# Altium PCB PR2017-DC_Load_Mosfet.PcbDoc
Units mm, origin at the board's own origin, x right, y up, seen from the top; angles counter-clockwise.
Board outline 275.1 x 160 mm, 2 copper layers (Top Layer, Bottom Layer); 69 components, 95 nets, 275 pads, 0 vias.
Unrouted connection lines stored in the file: 176.
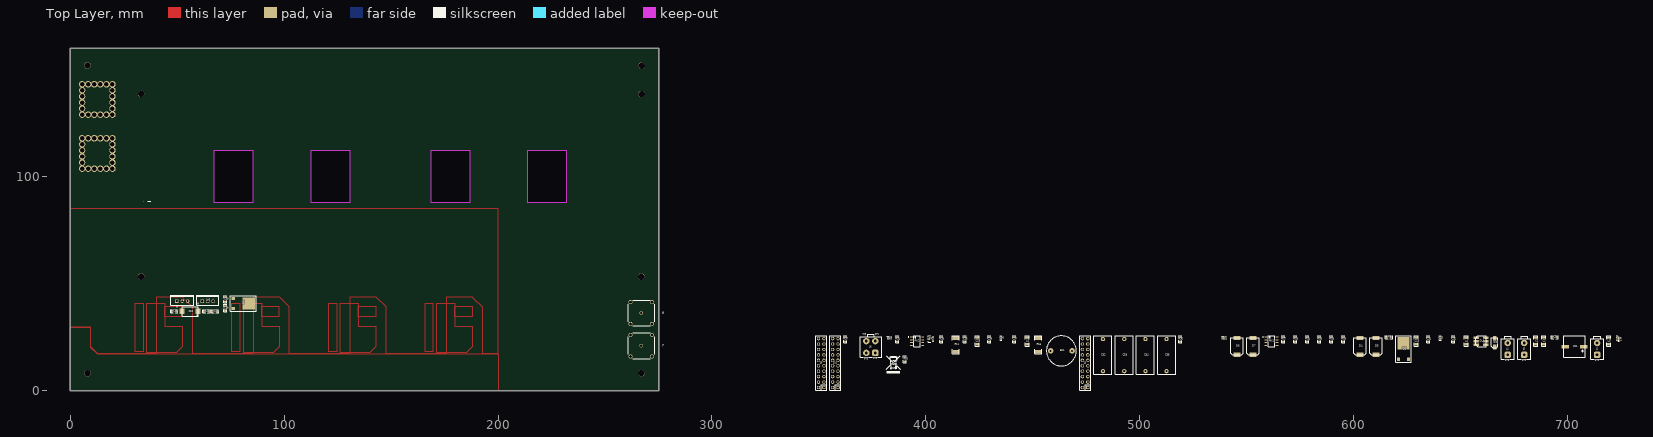
[diagram p0: Top Layer view]
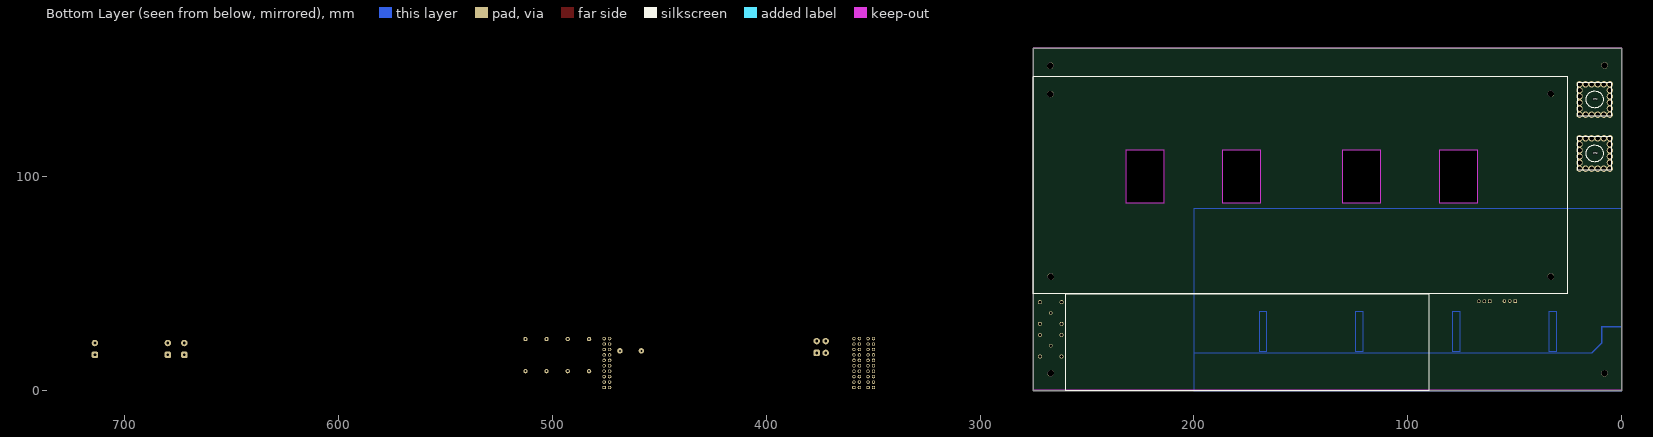
[diagram p1: Bottom Layer view, seen from below]

## Layer stack, top to bottom
Top Solder: solder mask 0.0102, Solder Resist, Dk 3.5
Top Layer: signal copper 0.0356
Dielectric 1: dielectric 0.32, FR-4, Dk 4.8
Bottom Layer: signal copper 0.0356
Bottom Solder: solder mask 0.0102, Solder Resist, Dk 3.5

## Board outline
0,0 0,160 275.1,160 275.1,0
cut-out: 67.35,87.85 67.35,112.35 85.35,112.35 85.35,87.85
cut-out: 168.75,87.85 168.75,112.35 186.75,112.35 186.75,87.85
cut-out: 112.55,87.85 112.55,112.35 130.55,112.35 130.55,87.85
cut-out: 213.85,87.85 213.85,112.35 231.85,112.35 231.85,87.85

## Design rules (kind name [scope] priority, off if disabled: settings)
Clearance Keep-Poly [(OnLayer('Keep-Out Layer')) vs (InPoly)] p1: gap=0.5 ignorepadtopadclearanceinfootprint=FALSE
Clearance Polygon [All vs (InPoly)] p2: gap=1 ignorepadtopadclearanceinfootprint=FALSE
Clearance Keepout [All vs (OnLayer('Keep-Out Layer'))] p3: gap=0.5 ignorepadtopadclearanceinfootprint=FALSE
Clearance [All] p4: gap=0.2 ignorepadtopadclearanceinfootprint=FALSE
ComponentClearance [All] p1: gap=0.1 collisioncheckmode=3 verticalgap=0.2 showdistances=FALSE
DiffPairsRouting [All] p1: maxlimit=0.254 minlimit=0.254 mostfreqgap=0.254 toplayer_minwidth=0.381 toplayer_maxwidth=0.381 toplayer_prefwidth=0.381 bottomlayer_minwidth=0.381 bottomlayer_maxwidth=0.381 bottomlayer_prefwidth=0.381 maxuncoupledlength=12.7
FabricationTestPointUsage TestPointUsage [All] p1: valid=0 allowmultiple=FALSE
FabricationTestpoint Testpoint [All] p1: side=3 testpointundercomponent=TRUE minsize=1.016 maxsize=2.54 preferedsize=1.524 minholesize=0 maxholesize=1.016 preferedholesize=0.813 testpointgrid=0.025 allowsidetop=TRUE allowsidebottom=TRUE usegrid=TRUE gridtolerance=0
HoleSize [All] p1: absolutevalues=TRUE maxlimit=3.5 minlimit=0 maxpercent=80.000 minpercent=20.000
PlaneClearance [All] p1: clearance=1
PlaneConnect [All] p1: planeconnectstyle=Direct reliefexpansion=0.508 reliefentries=4 reliefconductorwidth=0.254 reliefairgap=0.254
PolygonConnect PolygonConnect_1 [InNet('BAT+')] p1: connectstyle=Direct reliefconductorwidth=0.254 reliefentries=4 polygonreliefangle="90 Angle" airgapwidth=0.254
PolygonConnect [All] p2: connectstyle=Direct reliefconductorwidth=0.8 reliefentries=4 polygonreliefangle="90 Angle" airgapwidth=0.254
RoutingVias [All] p1: holewidth=0.3 width=0.6 viastyle="Through Hole" minholewidth=0.3 minwidth=0.6 maxholewidth=0.8 maxwidth=1.3
SolderMaskExpansion [(IsVia)] p1: expansion=-10 istentingtop=FALSE
Width SGND [InNet('SGND')] p1: maxlimit=2 minlimit=0.3 preferedwidth=0.5 minimp=50.000000 maximp=50.000000 favimp=50.000000
Width PGND [InNet('PGND')] p2: maxlimit=3 minlimit=0.5 preferedwidth=0.5 minimp=50.000000 maximp=50.000000 favimp=50.000000
Width [All] p3: maxlimit=2 minlimit=0.2 preferedwidth=0.2 minimp=50.000000 maximp=50.000000 favimp=50.000000
23 further rules are at their usual default settings.

## Classes and differential pairs
component class PR2017-DC_LoadMotherBoard: Bz1 C1 C2 C3 C15 C21 C22 C23 C24 C25 C27 C28 C29 C30 C32 C33 C34 C35 CES1 CT2 CT3 D2 D4 D5 D6 D7 DL1 J1 J3 J4 J5 J6 J7 J8 J9 J10 L3 L4 L5 Q2 R3 R10 R11 R13 R14 R15 R16 R17 R18 R19 R20 R23 R24 R27 RN1 RN2 TR2 U1 U7 U8
channel class Pwr: U_Pwr1 U_Pwr2 U_Pwr3 U_Pwr4
net class Temperature[1..4]: Temperature1 Temperature2 Temperature3 Temperature4
net class Out_Current[1..4]: Out_Current1 Out_Current2 Out_Current3 Out_Current4
component class PowerSupply: C10 C11 C12 C17 C18 C19 U4 U5 U6
differential pair Power: +Power_P -Power_N

## Components (designator, comment, footprint, x,y, rotation, side; value= is the part's Value field where it differs from the comment)
Bz1 "BUZZER" CB13PA 463.399,18.552 r0 top
C1 "10uF X7R 50V" 1206 685.199,23.152 r90 top
C2 "10uF X7R 50V" 1206 688.999,23.152 r90 top
C3 "100nF X7R 100V" 0805 694.099,24.952 r0 top
C10 "22uF 25V" TANT_D 56,37 r0 top
C11 "1uF X7R 25V" 0805 48.6,37 r0 top
C12 "100nF X7R 50V" 0805 63.7,37 r0 top
C15 "100nF X7R 100V" 0805 418.199,23.952 r90 top
C17 "10uF X5R 10V" 0805 67.6,37 r180 top
C18 "100nF X7R 50V" 0805 72.5,38.6 r90 top
C19 "10uF X5R 10V" 0805 72.5,42.7 r270 top
C21 "220uF 50V" C_G55 703.299,20.552 r0 top
C22 "10pF C0G" 0805 646.599,23.952 r90 top
C23 "10uF X7R 50V" 1206 629.299,23.152 r90 top
C24 "100nF X7R 100V" 0805 634.899,23.952 r90 top
C25 "1nF X7R 50V" 0603 640.499,24.552 r90 top
C27 "10pF C0G" 0805 441.299,23.952 r90 top
C28 "10uF X7R 50V" 1206 423.999,23.152 r90 top
C29 "100nF X7R 100V" 0805 429.599,23.952 r90 top
C30 "1nF X7R 50V" 0603 435.199,24.552 r90 top
C32 "1uF 250V" POL-P15 482.799,16.552 r90 top
C33 "1uF 250V" POL-P15 492.799,16.552 r90 top
C34 "1uF 250V" POL-P15 502.699,16.552 r90 top
C35 "1uF 250V" POL-P15 512.599,16.552 r90 top
CES1 "CESTINO" Cestino1 384.799,13.1 r0 top
CT2 "POWERPLUS F-M8" "PowerPlus M8" 12.6,136.1 r270 bottom
CT3 "POWERPLUS F-M8" "PowerPlus M8" 12.6,110.851 r270 bottom
D2 "STPS140A" SMA 665.999,22.352 r90 top
D4 "STPS5L60SY" SMC 602.999,20.652 r90 top
D5 "STPS5L60SY" SMC 610.499,20.652 r90 top
D6 "STPS5L60SY" SMC 545.499,20.652 r90 top
D7 "STPS5L60SY" SMC 552.999,20.652 r90 top
DL1 "LED_5050RGB" LED_5050RGB 659.599,23.052 r0 top
J1 "M_FIT1X2" M_FIT_JR1X2V 713.899,19.452 r0 top
J3 "ToDAS" IDC-20 474.499,12.852 r90 top
J4 "M_FIT1X2" M_FIT_JR1X2V 672.099,19.452 r0 top
J5 "M_FIT1X2" M_FIT_JR1X2V 679.799,19.452 r0 top
J6 "M_FIT2X2_BUS" M_FIT_JR2X2V 374.3,20.35 r0 top
J7 "51K204-400A5" ROS-51K204-400A5_V 266.95,20.95 r270 top
J8 "51K204-400A5" ROS-51K204-400A5_V 266.95,36.25 r270 top
J9 "FromDAS" IDC-20 351.099,12.852 r90 top
J10 "ToFrontPanel" IDC-20 357.699,12.852 r90 top
L3 "80R 3A" 1206 719.399,23.152 r90 top
L4 "80R 3A" 1206 652.699,23.152 r90 top
L5 "80R 3A" 1206 447.399,23.152 r90 top
Q2 "STD30NF06LT4" DPAK 623.399,18.352 r90 top
R3 "470R" 0805 616.599,24.952 r0 top
R10 "100K" 0805 390.199,14.6 r90 top
R11 "2K" 2512 414.099,21.352 r90 top
R13 "1K8" 0805 572.699,23.952 r90 top
R14 "1K8" 0805 578.299,23.952 r90 top
R15 "120K" 2512 452.499,21.352 r90 top
R16 "1K8" 0805 583.899,23.952 r90 top
R17 "100K" 0805 567.099,23.952 r90 top
R18 "470R" 0805 589.499,23.952 r90 top
R19 "470R" 0805 595.099,23.952 r90 top
R20 "50R" 0805 518.999,23.952 r90 top
R23 "2K7" 0805 407.299,23.952 r90 top
R24 "100K" 0805 386.599,23.952 r90 top
R27 "50R" 0805 362.399,23.952 r90 top
RN1 "AORN100-1AT5" FP-AORN100-1AT5-IPC_C 561.599,23.052 r0 top value=1/100kΩ
RN2 "AORN100-1AT5" FP-AORN100-1AT5-IPC_C 395.899,23.052 r0 top value=1/100kΩ
TR2 "MMBT2222ALT1G" SOT-23 402.399,24.052 r0 top
U1 "AD5641AKSZ-500RL7" KS-6_L 724.099,24.052 r0 top
U4 "LD1117DT33" TO-252-7805 79.8,40.695 r0 top
U5 "LM2940CT-9.0/NOPB" NDE0003A 52.3,41.8 r0 top
U6 "LD1117V50" TO220 64.2,41.7 r0 top
U7 "NCS20071" SOT-553-5 539.599,24.552 r0 top
U8 "NCS20071" SOT-553-5 382.999,24.552 r0 top

## Footprints (in the part's own frame and the unit in brackets; to place one, negate y for a bottom-side part, rotate by r counter-clockwise, add the part's x,y. Pads: shape width x height; smd on the part's side, far side on the other; paste and mask are expansions set on the pad)
0603 [mil]
  rect 30x30 smd: 1(-27.5,0) 2(27.5,0)
  silkscreen extent -44,-17 44,17, body extent -31,-16 31,16, height 24
0805 [mm]
  rect 1.05x1.3 smd: 1(-1.075,0) 2(1.075,0)
  silkscreen extent -1.7,-0.69 1.7,0.69, body extent -1,-0.62 1,0.63, height 0.5
1206 [mm]
  rect 1.2x1.6 smd: 1(-1.6,0) 2(1.6,0)
  silkscreen extent -2.4,-0.89 2.4,0.89, body extent -1.6,-0.8 1.6,0.8, height 0.6
2512 [mil]
  rect 70x120 smd: 1(-125,0) 2(125,0)
  silkscreen extent -165,-65 165,65, body extent -134,-65 134,65, height 25
C_G55 [mm]
  rect 3.5x1.6 smd: 1(4.3,0) 2(-4.3,0)
  silkscreen extent -5,-5 5,5, body extent -5.8,-5.15 5.8,5.15, height 10.2
CB13PA [mm]
  round 2.54 hole 0.889: 1(-5,0) 2(5,0)
  silkscreen extent -7,-7 7,7, body extent -6.9,-6.9 6.9,6.9, height 6.8
Cestino1 [mm]
  silkscreen extent -3.25,-5.25 3.25,3.2
DPAK [mm]
  rect 1.6x1.4 smd: 1(-3.7,2.285) 3(-3.7,-2.285)
  rect 5.8x5.6 smd: 2(3.7,0)
  silkscreen extent -5.1,-3.58 7.2,3.58, body extent -4.2,-3.3 5.9,3.3, height 2.4
FP-AORN100-1AT5-IPC_C [mm]
  rect 1.269x0.499 smd paste+0 mask+0: 1(-2.62,1.905)
  rrect100% 1.269x0.499 smd paste+0 mask+0: 2(-2.62,0.635) 3(-2.62,-0.635) 4(-2.62,-1.905) 5(2.62,-1.905) 6(2.62,-0.635) 7(2.62,0.635) 8(2.62,1.905)
  silkscreen extent -4.12,-2.46 1.49,2.46, body extent -3.35,-2.57 3.35,2.57, height 0.25
IDC-20 [mm]
  rrect50% 1.6x1.6 hole 1: 1(-11.43,-1.27)
  round 1.6 hole 1: 2(-11.43,1.27) 3(-8.89,-1.27) 4(-8.89,1.27) 5(-6.35,-1.27) 6(-6.35,1.27) 7(-3.81,-1.27) 8(-3.81,1.27) 9(-1.27,-1.27) 10(-1.27,1.27) 11(1.27,-1.27) 12(1.27,1.27) 13(3.81,-1.27) 14(3.81,1.27) 15(6.35,-1.27) 16(6.35,1.27) 17(8.89,-1.27) 18(8.89,1.27) 19(11.43,-1.27) 20(11.43,1.27)
  silkscreen extent -12.7,-2.54 12.7,2.54, body extent -12.7,-2.55 12.7,2.53, height 10.1
KS-6_L [mm] "SOT23, 6-Leads, Body 2x1.3mm, Pitch 0.65mm, Lead Span 2.1mm, IPC High Density"
  rect 0.65x0.4 smd: 1(-0.95,0.65) 2(-0.95,0) 3(-0.95,-0.65) 4(0.95,-0.65) 5(0.95,0) 6(0.95,0.65)
  silkscreen extent -1.07,-1.1 0.25,1.52, body extent -0.67,-1.1 0.68,1.1, height 1.1
LED_5050RGB [mm]
  rect 2.5x1.2 smd: A1(2.2,1.7) A2(2.2,0) A3(2.2,-1.7) K1(-2.2,1.7) K2(-2.2,0) K3(-2.2,-1.7)
  silkscreen extent -2.5,-2.5 2.5,2.5, body extent -1.75,-1.4 1.75,1.4, height 1.95
M_FIT_JR1X2V [mm]
  rrect50% 3x3 hole 1.3: 1(0,-2.75)
  round 3 hole 1.3: 2(0,2.75)
  silkscreen extent -3,-4.75 3,5.89, body extent -3.1,-4.8 3.1,6.2, height 12.8
M_FIT_JR2X2V [mm]
  rrect50% 3x3 hole 1.3: 1(2.1,-2.75)
  round 3 hole 1.3: 2(-2.1,-2.75) 3(2.1,2.75) 4(-2.1,2.75)
  silkscreen extent -5,-4.75 5,5.89, body extent -5.2,-4.8 5.2,6.2, height 12.8
NDE0003A [mm] "FM, 3-Leads, Body 10.7x4.7mm, Pitch 2.54mm"
  rect 1.6x1.6 hole 1: 1(-2.54,0)
  round 1.6 hole 1: 2(0,0) 3(2.54,0)
  silkscreen extent -5.35,-2.62 5.35,2.85, body extent -5.4,-1.9 5.4,2.9, height 19.4
POL-P15 [mm]
  round 2 hole 1: 1(-7.5,0) 2(7.5,0)
  silkscreen extent -9,-4.2 9,4.2, body extent -9,-3 9,3, height 12
"PowerPlus M8" [mm] "PowerPlus con vite M8"
  round 3 hole 2.1: 1(-7.1,-7.1) 1(-7.1,-4.26) 1(-7.1,-1.42) 1(-7.1,1.42) 1(-7.1,4.26) 1(-7.1,7.1) 1(-4.26,-7.1) 1(-4.26,7.1) 1(-1.42,-7.1) 1(-1.42,7.1) 1(1.42,-7.1) 1(1.42,7.1) 1(4.26,-7.1) 1(4.26,7.1) 1(7.1,-7.1) 1(7.1,-7.1) 1(7.1,-4.26) 1(7.1,-1.42) 1(7.1,1.42) 1(7.1,4.26) 1(7.1,7.1)
  silkscreen extent -7.9,-7.9 7.9,7.9, body extent -7.9,-7.7 7.92,7.7, height 12
ROS-51K204-400A5_V [mm] "BNC 50R Right Angle Jack, 12.5x32.6x14.5mm, Rosenberger Recommended"
  round 1.6 hole 1.05: 1(0,0)
  round 1.9 hole 1.35: MH(-5.05,5.05) MH(-5.05,-5.05) MH(5.05,5.05) MH(5.05,-5.05)
  silkscreen extent -6,-6 6,6, body extent -6.25,-6 6.25,26.6, height 15.25
SMA [mm]
  rect 2.5x1.7 smd: A(2,0) K(-2,0)
  silkscreen extent -2.3,-1.5 2.3,1.5, body extent -2.6,-1.3 2.6,1.3, height 2.4
SMC [mil]
  rect 80x130 smd: A(155,0) K(-155,0)
  silkscreen extent -155,-115 155,115, body extent -160,-122 160,123, height 103
SOT-23 [mil]
  rect 36x36 smd: 1(40,-37.5) 2(40,37.5)
  rect 50x36 smd: 3(-40,0)
  silkscreen extent -45,-58 45,58, body extent -66,-59 58,59, height 39
SOT-553-5 [mm]
  rect 0.85x0.3 smd: 1(-0.8,0.5) 2(-0.8,0) 3(-0.8,-0.5) 4(0.8,-0.5) 5(0.8,0.5)
  silkscreen extent -1.22,-0.8 0.03,0.9
TANT_D [mm]
  rect 2.413x2.54 smd: 1(3.75,0) 2(-3.75,0)
  silkscreen extent -3.69,-2.29 3.81,2.21, body extent -3.65,-2.15 3.65,2.15, height 2.81
TO220 [mm] "TO, Thru-Hole, Vertical, Heatsink Mounted; 3 In-Line Leads; Pitch 2.54 mm"
  rect 1.7x1.7 hole 1.1: 1(-2.54,0)
  round 1.7 hole 1.1: 2(0,0) 3(2.54,0)
  silkscreen extent -5.2,-1.75 5.2,2.85, body extent -5.25,-1.8 5.25,2.9, height 19.7
TO-252-7805 [mm]
  rect 1.6x1.4 smd: 1(-3.7,2.285) 3(-3.7,-2.285)
  rect 5.8x5.6 smd: 2(3.7,0.005)
  silkscreen extent -5.1,-3.58 7.2,3.58, body extent -4.15,-3.3 5.95,3.3, height 2.4

## Part data
Bz1: "Buzzer", SMD/TH=TH
C1 C2 C23 C28: library part "CAP_10uF X7R 50V_1206", "Capacità", 1 Supplier Part Number=CL31B106KBHNNNE, ArSilicii Part Number=CPC0232011, 1 Supplier="ARROW ELECTRONICS ITALIA S.R.L.", ComponentLink1Description="Datasheet for 10uF X7R 25V", Manufacturer Part Number=CL31B106KBHNNNE, SMD/TH=SMD
C3 C15 C24 C29: library part "CAP_100nF X7R 100V_0805", "Capacità", 1 Supplier Part Number=CL21B104KCFSFNG, 2 Supplier Part Number=1907331, ArSilicii Part Number=CPC0213101, Manufacturer=SAMSUNG, 1 Supplier="ARROW ELECTRONICS ITALIA S.R.L.", 2 Supplier="FARNELL ITALIA S.R.L.", Manufacturer Part Number=CL21B104KCFSFNG, SMD/TH=SMD
C10: library part "CAP_TANT_22uF 25V Case D", "Capacità polarizzata", 1 Supplier Part Number=KETT491D226K025AT, ArSilicii Part Number=CPC0352022, Manufacturer=Kemet, Manufacturer Part Number=T491D226K025AT, 1 Supplier="DISTAR S.R.L.", 1 Supplier Unit Price=0,060, 2 Supplier="ABACUS ECC S.R.L. - UNIPERSONALE", 2 Supplier Part Number=KETT491D226K025AT, 3 Supplier="ARROW ELECTRONICS ITALIA S.R.L.", 3 Supplier Part Number=KETT491D226K025AT, SMD/TH=SMD
C11: library part "CAP_1uF X7R 25V_0805", "Capacità", 1 Supplier Part Number=CL21B105KAFNNNG, ArSilicii Part Number=CPC0212002, Manufacturer=Samsung, 1 Supplier="AVNET EMG ITALY S.R.L.", Manufacturer Part Number=CL21B105KAFNNNG, SMD/TH=SMD
C12 C18: library part "CAP_100nF X7R 50V_0805", "Capacità", 1 Supplier Part Number=C0805C104K5RAC7800, 2 Supplier Part Number="08055C104KAT2A AVX", ArSilicii Part Number=CPC0213100, Manufacturer=Kemet, 1 Supplier="ARROW ELECTRONICS ITALIA S.R.L.", 1 Supplier Unit Price=0,00240, 2 Supplier="AVNET EMG ITALY S.R.L.", Manufacturer Part Number=C0805C104K5RAC7800, SMD/TH=SMD
C17 C19: library part "CAP_10uF X5R 10V_0805", "Capacità", 1 Supplier Part Number=CL21A106KPFNNNE, ArSilicii Part Number=CPC0212010, Manufacturer=Samsung, 1 Supplier="ARROW ELECTRONICS ITALIA S.R.L.", HelpURL=\\Sorp\articoli\CPC0212010\F3102_CerPerChar.pdf, Manufacturer Part Number=CL21A106KPFNNNE, SMD/TH=SMD
C21: library part "CAP_EL_220uF 50V", "Capacità polarizzata", 2 Supplier Part Number=5194346, ArSilicii Part Number=CPC0402221, Manufacturer=Nichicon, Manufacturer Part Number=UPS1H221MPD, 1 Supplier="ARROW ELECTRONICS ITALIA S.R.L.", 1 Supplier Unit Price=0,04516, 2 Supplier="RS COMPONENTS S.P.A.", ComponentLink1Description="Datasheet for 220uF 50V", ComponentLink1URL=http://docs-europe.electrocomponents.com/webdocs/0649/0900766b8064973a.pdf, SMD/TH=TH
C22 C27: library part "CAP_10pF C0G_0805", "Capacità", ArSilicii Part Number=CPC0614010, 1 Supplier Unit Price=0,09, SMD/TH=SMD
C25 C30: library part "CAP_1nF X7R 50V_0603", "Capacità", 1 Supplier Part Number=CC0603JRX7R9BB102, ArSilicii Part Number=CPC0263001, Manufacturer=KEMET, Manufacturer Part Number=C0603C102K5RACTU, 1 Supplier="ARROW ELECTRONICS ITALIA S.R.L.", SMD/TH=SMD
C32 C33 C34 C35: library part "CAP_POL_1uF 250V P.15", "Capacità poliestere", ArSilicii Part Number=CPC0502002, Manufacturer Part Number=MKTR60II4100ZB30K, SMD/TH=TH
CT2 CT3: library part "PAD_POWERPLUS F-M8", "Singolo contatto", 1 Supplier Part Number=S98978, ArSilicii Part Number=QC04000180, Manufacturer=WURTH, Manufacturer Part Number=93517, 1 Supplier="Würth Elektronik ICS GmbH & Co. KG", SMD/TH=TH
D2: library part "DIODE SCHOTTKY_STPS140A", "Diodo Schottky", 1 Supplier Part Number=STMSTPS140A, ArSilicii Part Number=CPDS117000, Manufacturer=STMicroelectronics, 1 Supplier="ARROW ELECTRONICS ITALIA S.R.L.", 1 Supplier Unit Price=0,0600, ComponentLink1Description="Datasheet for STPS140A", ComponentLink1URL=http://www.st.com/web/en/resource/technical/document/datasheet/CD00001107.pdf, Manufacturer Part Number=STPS140A, SMD/TH=SMD
D4 D5 D6 D7: library part "DIODE SCHOTTKY_STPS5L60SY", "Automotive power Schottky rectifier", 1 Supplier Part Number=511-STPS5L60SY, Manufacturer=STM, 1 Supplier=MOUSER, 1 Supplier Unit Price=0,678, Manufacturer Part Number=STPS5L60SY, SMD/TH=SMD
DL1: "LED RGB", SMD/TH=SMD
J1 J4 J5: "Mini Fit Junior 2 poli", ArSilicii Part Number=QA02006000, Manufacturer=Molex, Manufacturer Part Number=39-28-1023, 1 Supplier="ABACUS ECC S.R.L. - UNIPERSONALE", 1 Supplier Unit Price=0,07900, 2 Supplier="HT COMPONENTI ELETTRONICI S.R.L.", ComponentLink1Description="Datasheet for M_FIT1X2", ComponentLink1URL=http://www.molex.com/webdocs/datasheets/pdf/en-us/0039281023_PCB_HEADERS.pdf, SMD/TH=TH
J3 J9 J10: library part "HEADER 10X2", SMD/TH=TH
  J3 J9: System=Connector
J6: "Mini Fit Junior 4 poli", 2 Supplier Part Number=P6657I-04, 3 Supplier Part Number=EY5900-W04ST, ArSilicii Part Number=QA02009000, Manufacturer=Molex, Manufacturer Part Number=39-28-1043, 1 Supplier="ABACUS ECC S.R.L. - UNIPERSONALE", 1 Supplier Unit Price=0,08856, 2 Supplier="SIRIO S.R.L.", 3 Supplier="ELECTRONIC CENTER S.P.A.", ComponentLink1Description="Datasheet for M_FIT2X2", ComponentLink1URL=http://www.molex.com/webdocs/datasheets/pdf/en-us/0039281043_PCB_HEADERS.pdf, SMD/TH=TH
J7 J8: library part CMP-0753-00004-1, "BNC 50R Right Angle Jack, Panel Feedthrough, Up to 10 GHz, -55 to 155 degC", Manufacturer=Rosenberger, ComponentLink1Description="Manufacturer URL", ComponentLink1URL=http://www.rosenberger.de, ComponentLink2Description=Datasheet, ComponentLink2URL=http://rosenberger.de/ok/images/documents/db/51K204-400A5.pdf, ComponentLink3Description="Package Specification", ComponentLink3URL=http://rosenberger.de/ok/images/documents/db/51K204-400A5.pdf, ComponentLink4Description="Series Overview / Design Note", ComponentLink4URL=http://rosenberger.de/ok/images/documents/spez/51.pdf, ComponentLink5Description="Webshop / RFQ", ComponentLink5URL=http://www.rosenberger.com/en/contact/sales/, DatasheetVersion=d00, Design Note="Footprint in library is a generic example - only application specific footprint delivers High Performance", Mounting Technology="Through Hole", PackageDescription="50R BNC Right Angle Jack, 12.5 x 32.6 x 14.5 mm", PackageReference=51K204-400A5, PackageVersion=d00, PartNumber=51K204-400A5
L3 L4 L5: library part "Ferrite 80R 3A", "Ferrite", 1 Supplier Part Number=3275550P, ArSilicii Part Number=CPF0006000, Manufacturer="Wurth Elektronik", Manufacturer Part Number=74279215, Supplier Part Number 1=732-1629-1-ND, 1 Supplier="RS COMPONENTS S.P.A.", 1 Supplier Unit Price=0,21000, ComponentLink1Description="Datasheet for Ferrite 80R 3A", ComponentLink1URL=http://docs-europe.electrocomponents.com/webdocs/0033/0900766b80033a26.pdf, SMD/TH=SMD, Supplier 1=Digi-Key
Q2: library part "MOS-N STD30NF06", "N-CHANNEL 60V - 0.020 Ω - 28A IPAK/DPAK  STripFET™ II POWER MOSFET", 1 Supplier Part Number=STD30NF06LT4/STM, ArSilicii Part Number=CPTP200030, Manufacturer=STMicroelectronics, Supplier Part Number 1=497-4101-1-ND, 1 Supplier="EBV ELEKTRONIK S.R.L.", 1 Supplier Unit Price=0,203, ComponentLink1Description="Datasheet for STD30NF06LT4", ComponentLink1URL=http://www.mouser.com/ds/2/389/CD00002155-250311.pdf, Manufacturer Part Number=STD30NF06LT4, SMD/TH=SMD, Supplier 1=Digi-Key
R3 R10 R11 R13 R14 R15 R16 R17 R18 R19 R20 R23 R24 R27: library part RES_SMD, "Resistenza", SMD/TH=SMD
RN1 RN2: library part CMP-02406-000003-1, "RES NETWORK 4 RES MULT OHM 8SOIC", Manufacturer=Vishay, Number Of Resistors=4, Power Per Resistor=100mW, Power Rating=400mW, Resistance=1/100kΩ, Temperature="-55°C to +155°C", Temperature Coefficient=25ppm/°C, Temperature Range High=+155°C, Temperature Range Low=-55°C, Tolerance=0.1%, Automotive=Yes, Automotive Grade="Grade 0", Category=Res, ComponentLink2Description=Datasheet, ComponentLink2URL=https://www.vishay.com/docs/60127/aorn.pdf, Composition="Thin Film", Device Class L1="Passive Components", Device Class L2=Resistors, Device Class L3="Resistor Arrays", Digikey Description="RES NETWORK 4 RES MULT OHM 8SOIC", Height=1.73mm, Ipc Land Pattern Name=SOIC127P607X173-8, Lead Free=Yes, Manufacturer Part Number=AORN100-1AT5, Octopart=https://octopart.com/aorn1001at5-vishay-54384707, Package=AORN100-1AT5, RoHS=TRUE, Series=AORN, Standoff Height=0.1524mm, Termination=Gull-Wing
TR2: library part NPN_MMBT2222ALT1G, "NPN Transistor", 1 Supplier Part Number=SCGMMBT2222ALT1G, 2 Supplier Part Number=1459098, ArSilicii Part Number=CPTS001000, Manufacturer="ON SEMICONDUCTOR", 1 Supplier="ARROW ELECTRONICS ITALIA S.R.L.", 1 Supplier Unit Price=0,00777, 2 Supplier=Farnell, 2 Supplier Unit Price=0,085, ComponentLink1Description="Datasheet for MMBT2222ALT1G", ComponentLink1URL=http://www.onsemi.com/pub_link/Collateral/MMBT2222LT1-D.PDF, HelpURL="D:\Documenti ArSilicii\DataSheet\Transistor\MMBT2222LT1-D.pdf", Manufacturer Part Number=MMBT2222ALT1G, SMD/TH=SMD, Supplier 1=Farnell, Supplier Part Number 1=1459098
U1: library part CMP-0318-01433-2, "Single 14-Bit nanoDAC with SPI Interface, 5 V, <100 uA, -40 to +125 degC, KS-6, Pb-Free, Reel", Generic Part Number=AD5641, Manufacturer="Analog Devices", # DAC Outputs=1, Code_JEDEC=MO-203-AB, ComponentLink1Description="Manufacturer URL", ComponentLink1URL=http://www.analog.com/en/index.html, ComponentLink2Description=Datasheet, ComponentLink2URL=http://www.analog.com/static/imported-files/data_sheets/AD5641.pdf, ComponentLink3Description="Package Specification", ComponentLink3URL=http://www.analog.com/static/imported-files/packages/PKG_PDF/SC70(KS)/KS_6.pdf, ComponentLink4Description="Product URL", ComponentLink4URL=http://www.analog.com/en/digital-to-analog-converters/da-converters/ad5641/products/product.html, DatasheetVersion=Rev.D, Max V+=5.5V, Mounting Technology="Surface Mount", Op Pwr Diss=550ÂµW, PackageDescription="6-Lead Thin Shrink Small Outline Transistor Package [SC70]", PackageReference=KS-6, PackageVersion=072809-A, Packing=Reel, PartNumber=AD5641AKSZ-500RL7, Resolution (Bits)=14, RevisionNote="Component URL fixed", RoHS=Y, Settling Time=6Âµs, Single Supply=Yes
U4: "Regolatore Low Dropout", 1 Supplier Part Number="LD1117DT33TR TO252-3", ArSilicii Part Number=IC01000010, Manufacturer=ST, 1 Supplier="HT COMPONENTI ELETTRONICI S.R.L.", 1 Supplier Unit Price=0,105, 2 Supplier="EBV ELEKTRONIK S.R.L.", ComponentLink1Description="Datasheet for LD1117DT33", ComponentLink1URL=http://www.st.com/st-web-ui/static/active/en/resource/technical/document/datasheet/CD00000544.pdf, HelpURL="D:\Documenti ArSilicii\DataSheet\Regolatori\LD1117.pdf", Manufacturer Part Number=LD1117DT33, SMD/TH=SMD
U5: library part CMP-0062-02531-3, "1A Low Dropout Regulator, 3-pin TO-220, Pb-Free", Manufacturer="Texas Instruments", PackageTopMarking="NSUZXYTTE#*LM2940CT*-9.0 P+", PowerWise=N, ComponentLink1Description="Datasheet URL", ComponentLink1URL=http://www.ti.com/general/docs/lit/getliterature.tsp?genericPartNumber=LM2940C&fileType=pdf, CompType="LDO IC", PackageDescription="TO-220, Molded, 3 Lead, Straight", PackageReference=NDE0003A, PinCount=3, RoHS=Y
U6: library part CMP-0244-00472-1, "Fixed Low Drop Positive Voltage Regulator, 5V, 3-Pin TO-220", ComponentLink1Description="Manufacturer URL", ComponentLink1URL=http://www.st.com, ComponentLink2Description=Datasheet, ComponentLink2URL=http://www.st.com/internet/com/TECHNICAL_RESOURCES/TECHNICAL_LITERATURE/DATASHEET/CD00000544.pdf, ComponentLink3Description="Package Specification", ComponentLink3URL=http://www.st.com/internet/com/TECHNICAL_RESOURCES/TECHNICAL_LITERATURE/PACKAGE_INFORMATION/CD00004649.pdf, DatasheetVersion=1/11/2011, PackageDescription="TO, Thru-Hole, Vertical, Heatsink Mounted; 3 In-Line Leads; Pitch 2.54 mm", PackageReference=TO220, PackageVersion=ver3.0
U7 U8: "Rail-to-Rail Input/Output, 3 MHz Op Amps", 1 Supplier Part Number=MCP6021-E/SN-ND, Manufacturer="Microchip Technology", Manufacturer Part Number=MCP6021-E/SN, 1 Supplier=DigiKey, 1 Supplier Unit Price=1,22, ComponentLink1Description="Datasheet for MCP6021", ComponentLink1URL=http://ww1.microchip.com/downloads/en/DeviceDoc/21685d.pdf, SMD/TH=SMD

## Free pads (board coordinates)
  round 3 hole 3: 2(8,8) 2(8,152) 2(33.1,53.3) 2(33.1,138.7) 2(267,53.3) 2(267,8) 2(267.1,138.6) 2(267.1,151.9)

## Nets (pads, with @x,y where several pads share a name; then routed paths per layer and width w, separated by ;. In a path a pad name is that pad's centre, name@x,y a point inside that pad or via, vN(x,y) a via of type N, cw(c..) or ccw(c..) an arc to the next point about the centre after c; other vN are vias at no path point)
+3V3: C19.1 DL1.A1 DL1.A2 DL1.A3 J3.6 J3.8 J3.10 U4.2
+5V0: Bz1.1 C17.1 C18.1 J3.1 J3.3 J3.18 J3.20 L3.1 U4.3 U6.2
+9V0: C10.1 C12.1 L4.1 L5.1 U5.3 U6.3
+12V0: C11.1 C21.1 D2.K J1.2 J4.2 J5.2 J6.4 J10.2 U5.1
Buzzer: J10.10 R23.2 R24.2
C_1_U_Pwr1: 
C_1_U_Pwr2: 
C_1_U_Pwr3: 
C_1_U_Pwr4: 
Cs: J9.7 J10.7
DAC_Clk: J10.4 U1.2
DAC_Data: J10.6 U1.3
DAC_Sync: J10.8 U1.1
Din: J9.3 J10.3
Dout: J9.5 J10.5
Drdy: J9.13 J10.13
Fan: J10.18 R3.2 R17.2
GND: C1.2 C2.2 C3.2 C10.2 C11.2 C12.2 C17.2 C18.2 C19.2 C21.2 C22.2 C23.2 C24.2 C25.2 C27.2 C28.2 C29.2 C30.2 J1.1 J3.12 J3.14 J3.16 J6.1 J6.2 J6.3 J7.MH J8.MH J9.2 J9.4 J9.6 J9.8 J9.10 J9.12 J9.14 J9.15 J9.16 J9.17 J9.18 J9.19 J9.20 J10.15 J10.17 J10.19 Q2.3 R10.1 R17.1 R24.1 RN2.1 TR2.2 U1.5 U4.1 U5.2 U6.1 U7.2 U8.2
Led_Blue: J10.16 R16.1
Led_Green: J10.14 R14.1
Led_Red: J10.12 R13.1
Nc_1_U_Pwr1: 
Nc_1_U_Pwr2: 
Nc_1_U_Pwr3: 
Nc_1_U_Pwr4: 
NetBz1_2: Bz1.2 TR2.3
NetC1_1: C1.1 C2.1 C3.1 L3.2 U1.4
NetC4_U_Pwr1_1: 
NetC4_U_Pwr2_1: 
NetC4_U_Pwr3_1: 
NetC4_U_Pwr4_1: 
NetC7_U_Pwr1_1: 
NetC7_U_Pwr2_1: 
NetC7_U_Pwr3_1: 
NetC7_U_Pwr4_1: 
NetC13_U_Pwr1_1: 
NetC13_U_Pwr2_1: 
NetC13_U_Pwr3_1: 
NetC13_U_Pwr4_1: 
NetC16_U_Pwr1_1: 
NetC16_U_Pwr2_1: 
NetC16_U_Pwr3_1: 
NetC16_U_Pwr4_1: 
NetC22_1: C22.1 C23.1 C24.1 C25.1 L4.2 U7.5
NetC27_1: C27.1 C28.1 C29.1 C30.1 L5.2 U8.5
NetC32_1: C32.1 C33.1 C34.1 C35.1 D4.K D5.K R18.2 R19.2
NetC36_U_Pwr1_2: 
NetC36_U_Pwr2_2: 
NetC36_U_Pwr3_2: 
NetC36_U_Pwr4_2: 
NetD2_A: D2.A J4.1 J5.1 Q2.2
NetD3_U_Pwr1_A: 
NetD3_U_Pwr2_A: 
NetD3_U_Pwr3_A: 
NetD3_U_Pwr4_A: 
NetDL1_K1: DL1.K1 R13.2
NetDL1_K2: DL1.K2 R14.2
NetDL1_K3: DL1.K3 R16.2
NetJ7_1: J7.1 R20.1
NetJ8_1: J8.1 R27.1
NetQ2_1: Q2.1 R3.1
NetR1_U_Pwr1_1: 
NetR1_U_Pwr2_1: 
NetR1_U_Pwr3_1: 
NetR1_U_Pwr4_1: 
NetR9_U_Pwr1_1: 
NetR9_U_Pwr2_1: 
NetR9_U_Pwr3_1: 
NetR9_U_Pwr4_1: 
NetR20_2: R20.2 U7.3 U7.4
NetR21_U_Pwr1_1: U1.6
NetR23_1: R23.1 TR2.1
NetR27_2: R27.2 RN2.4 U8.4
NetRN1_5: RN1.5 RN1.6 RN1.7 RN1.8 U7.1
NetRN2_5: RN2.5 RN2.6 U8.3
NetRN2_7: RN2.7 RN2.8 U8.1
No_1_U_Pwr1: 
No_1_U_Pwr2: 
No_1_U_Pwr3: 
No_1_U_Pwr4: 
Out_Current1: J3.19 RN1.1
Out_Current2: J3.17 RN1.2
Out_Current3: J3.15 RN1.3
Out_Current4: J3.13 RN1.4
Power_Input: CT2.1 D4.A D5.A D6.K D7.K R15.1 R18.1 R19.1
Power_N: C15.2 C32.2 C33.2 C34.2 C35.2 CT3.1 D6.A D7.A J3.2 R11.2 RN2.3
Power_P: C15.1 J3.4 R11.1 R15.2 RN2.2
Range: J10.20 R10.2
Reset: J9.11 J10.11
Sclk: J9.1 J10.1
Start: J9.9 J10.9
Temperature1: J3.5
Temperature2: J3.7
Temperature3: J3.9
Temperature4: J3.11

## Polygon pours and split planes (outlines as drawn)
Power_N on Top Layer "NONET_L01_P016" (solid, remove dead copper, shelved, pour order 16): 188,43.779 188,43.7 192.6,39.1 192.6,17.52 200.022,17.52 200.028,18.051 200.028,85 0,85 0,29.737 9.398,29.737 9.398,20.602 12.48,17.52 40.5,17.52 40.5,43.779 52.4,43.779 56.979,39.2 57,39.2 57,17.52 85.7,17.52 85.7,43.779 97.6,43.779 97.621,43.779 102.2,39.3 102.2,17.52 130.9,17.52 130.9,43.779 142.9,43.779 147.379,39.3 147.4,39.3 147.4,17.52 176,17.52 176,43.779
No_1_U_Pwr4 on Top Layer "NONET_L01_P001" (solid, shelved, pour order 1): 52.4,20.479 49.621,17.7 35.8,17.7 35.8,20.465 35.814,20.479 35.814,40.8 44.2,40.8 44.2,29.979 52.4,29.979
No_1_U_Pwr3 on Top Layer "NONET_L01_P041" (solid, shelved, pour order 41): 97.6,20.479 94.821,17.7 81,17.7 81,20.465 81.014,20.479 81.014,40.8 89.4,40.8 89.4,29.979 97.6,29.979
No_1_U_Pwr2 on Top Layer "NONET_L01_P042" (solid, shelved, pour order 42): 142.824,20.479 140.045,17.7 126.224,17.7 126.224,20.465 126.238,20.479 126.238,40.8 134.624,40.8 134.624,29.979 142.824,29.979
No_1_U_Pwr1 on Top Layer "NONET_L01_P043" (solid, shelved, pour order 43): 187.937,20.479 185.158,17.7 171.337,17.7 171.337,20.465 171.351,20.479 171.351,40.8 179.737,40.8 179.737,29.979 187.937,29.979
Power_Input on Top Layer "NONET_L01_P005" (solid, shelved, pour order 5): 124.46,40.8 124.46,18.1 120.777,18.1 120.777,40.8
GND on Top Layer "NONET_L01_P040" (solid, shelved, pour order 40): 0,29.6 9.4,29.6 9.4,20.3 12.52,17.18 200,17.18 200,0 0,0
Power_Input on Top Layer "NONET_L01_P044" (solid, shelved, pour order 44): 34.036,40.779 34.036,18.1 30.353,18.1 30.353,40.779
Nc_1_U_Pwr1 on Top Layer "NONET_L01_P037" (solid, shelved, pour order 37): 179.737,34.579 179.737,39.479 187.837,39.479 187.837,34.579
Nc_1_U_Pwr2 on Top Layer "NONET_L01_P035" (solid, shelved, pour order 35): 134.624,34.579 134.624,39.479 142.724,39.479 142.724,34.579
Nc_1_U_Pwr3 on Top Layer "NONET_L01_P033" (solid, shelved, pour order 33): 89.4,34.579 89.4,39.479 97.5,39.479 97.5,34.579
Nc_1_U_Pwr4 on Top Layer "NONET_L01_P000" (solid, shelved, pour order 0): 44.2,34.579 44.2,39.479 52.3,39.479 52.3,34.579
Power_Input on Top Layer "NONET_L01_P006" (solid, shelved, pour order 6): 169.545,40.779 169.545,18.1 165.862,18.1 165.862,40.779
Power_Input on Top Layer "NONET_L01_P004" (solid, shelved, pour order 4): 79.236,40.779 79.236,18.1 75.553,18.1 75.553,40.779
Power_Input on Bottom Layer "NONET_L02_P026" (solid, remove dead copper, shelved, pour order 26): 0,85 200.028,85 200.028,18.285 200.022,17.779 13.948,17.779 9.359,22.368 9.398,22.407 9.398,29.972 0,29.972
GND on Bottom Layer "NONET_L02_P039" (solid, shelved, pour order 39): 0,29.6 9.4,29.6 9.4,22.1 14,17.5 200,17.5 200,0 0,0
Power_Input on Bottom Layer "NONET_L02_P009" (solid, shelved, pour order 9): 169.545,36.929 169.545,18.288 165.862,18.288 165.862,36.929
Power_Input on Bottom Layer "NONET_L02_P008" (solid, shelved, pour order 8): 124.46,36.929 124.46,18.288 120.777,18.288 120.777,36.929
Power_Input on Bottom Layer "NONET_L02_P007" (solid, shelved, pour order 7): 79.236,36.929 79.236,18.288 75.553,18.288 75.553,36.929
Power_Input on Bottom Layer "NONET_L02_P003" (solid, shelved, pour order 3): 34.036,36.929 34.036,18.288 30.353,18.288 30.353,36.929

## Keep-outs
Keep-Out Layer:
  lines w0.1: 0,0 0,160 275.1,160 275.1,0 ; 0.05,0.05 275.15,0.05

## Silkscreen, mask and mechanical layers (free items; w line width, h text height)
Top Overlay:
  pour cut-out: 67.35,112.35 85.35,112.35 85.35,87.85 67.35,87.85
  pour cut-out: 168.75,112.35 186.75,112.35 186.75,87.85 168.75,87.85
  pour cut-out: 112.55,112.35 130.55,112.35 130.55,87.85 112.55,87.85
  pour cut-out: 213.85,112.35 231.85,112.35 231.85,87.85 213.85,87.85
  lines w0.254: 36.2,88.5 36.3,88.5 37.5,88.5 ; 34.4,88.5 34.4,88.5
Bottom Overlay:
  lines w0.254: 179.4,0.186 179.586,0 ; 25.1,45.3 275.1,45.3 275.1,146.7 25.1,146.7 25.1,45.3 ; 90,0 260,0 260,45 90,45 90,0

## Text inside footprints (layer, text, board x,y; h text height)
J1: Top Overlay "1" at 714.699,13.452 h1.5 r90
J4: Top Overlay "1" at 672.899,13.452 h1.5 r90
J5: Top Overlay "1" at 680.599,13.452 h1.5 r90
J6: Top Overlay "1" at 377.2,14.35 h1.5 r90; Top Overlay "3" at 377.95,25.55 h1.5 r90; Top Overlay "4" at 372.15,25.55 h1.5 r90; Top Overlay "2" at 372.9,14.05 h1.5 r90